# EAGLE board BRAIN_Breakout_SW (EAGLE 6.6.0)
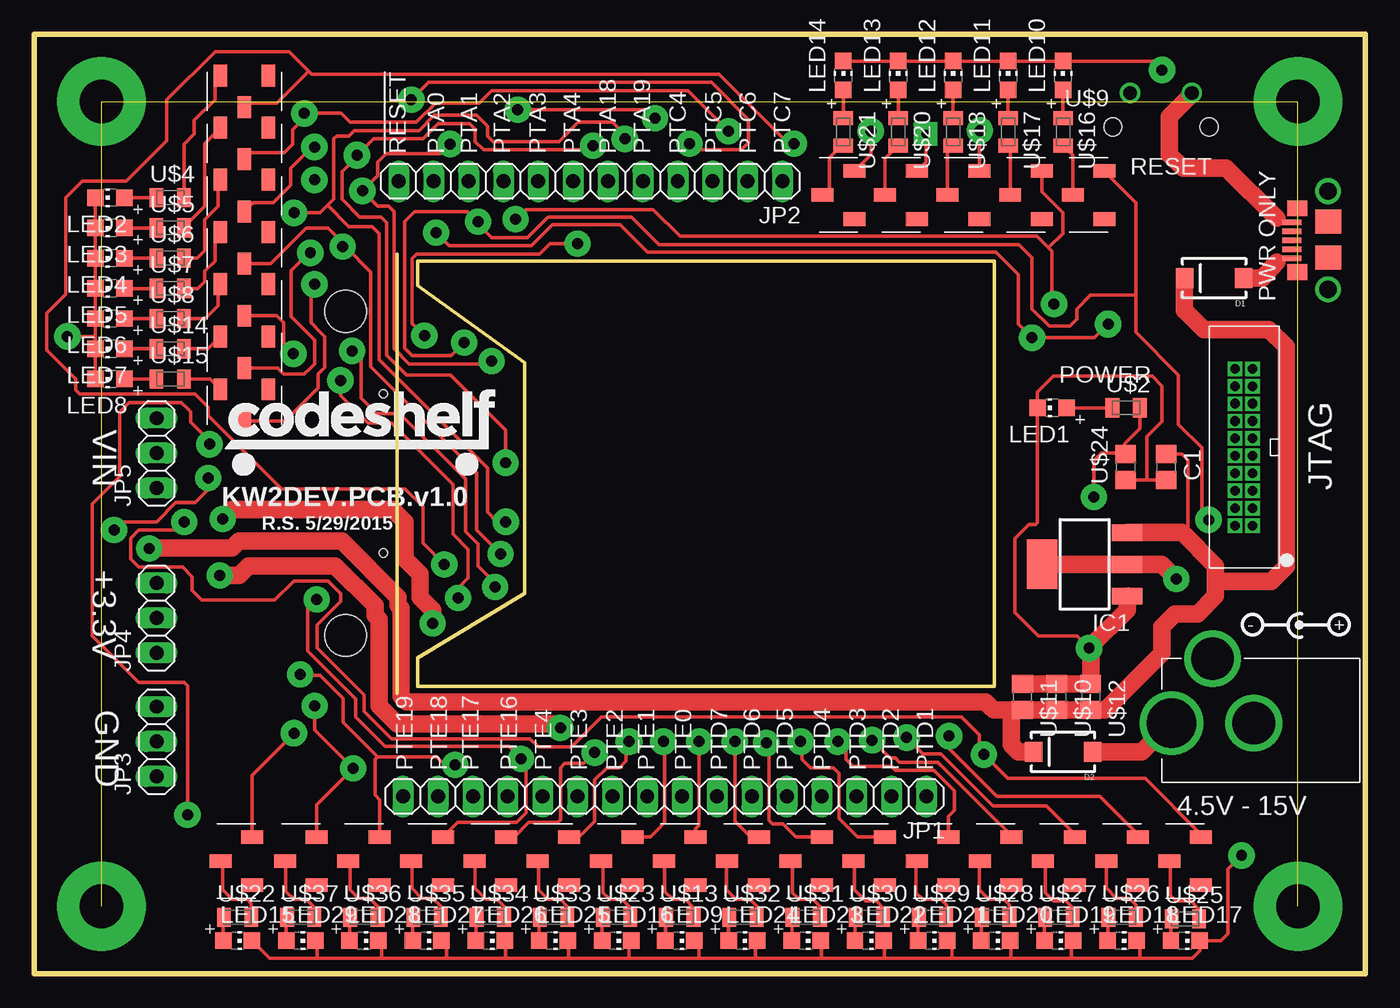
[diagram p0: board, top side]
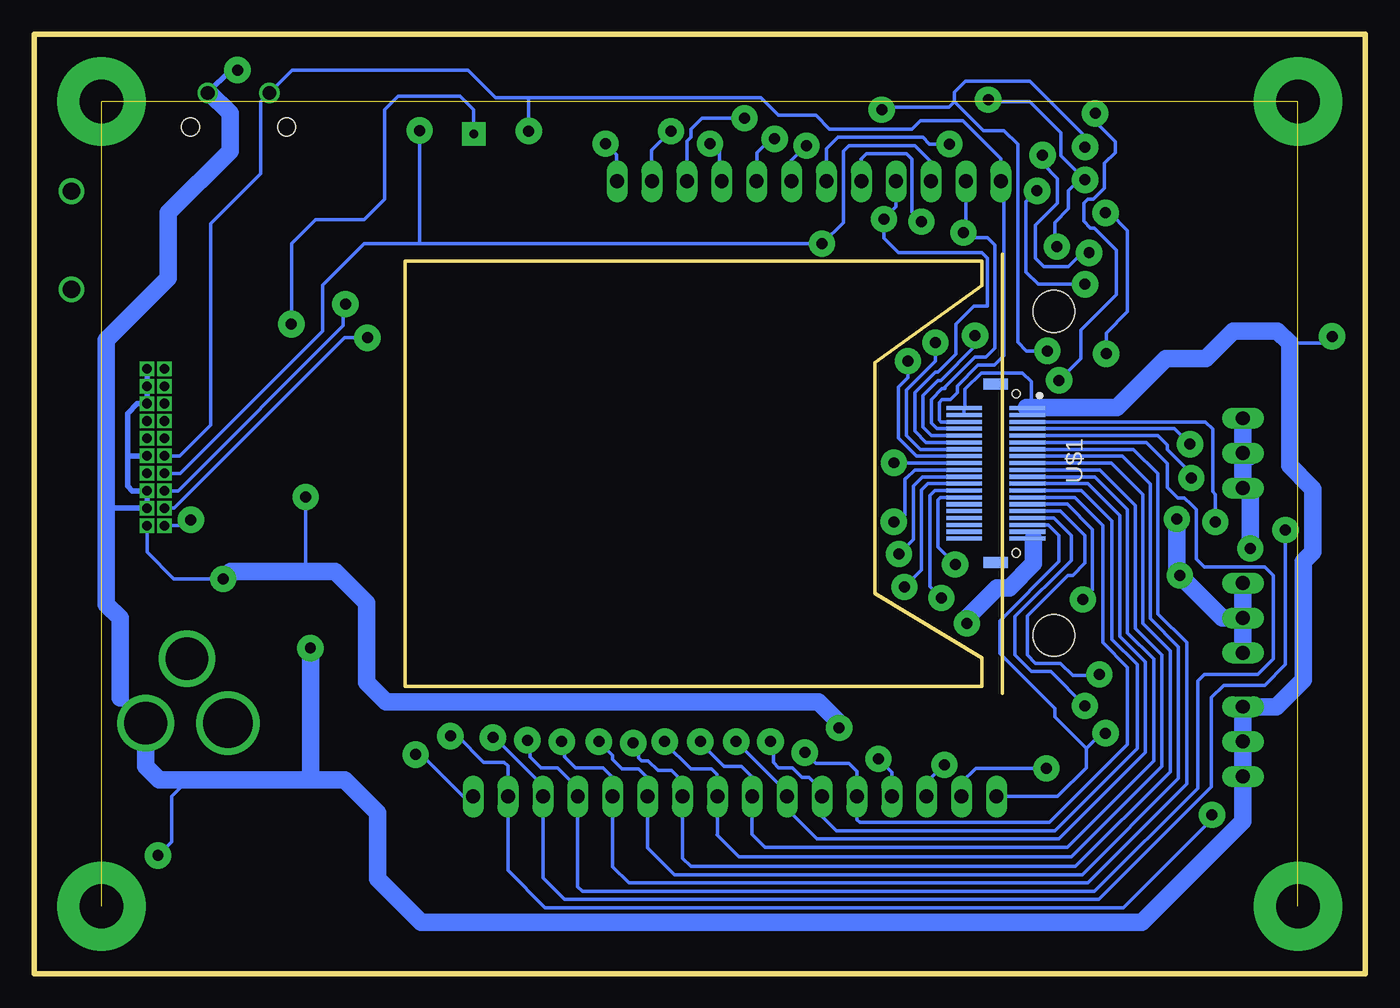
[diagram p1: board, bottom side, seen from below]

Size 96.9 x 68.4 mm. Coordinates in mm from the lower left corner, seen from the top.
Outline: 0,68.4 96.9,68.4 96.9,0 0,0 0,68.4
Copper layers (1*16): Top 0.035mm / dielectric 1.5mm / Bottom 0.035mm
Design rules "default *": minimum track width 10mil, minimum drill 0.8mm, track to track 0.15mm, track to pad 0.15mm, pad to pad 0.15mm, via to via 0.15mm, smd to smd 0.15mm, copper to edge 0.1mm, drill to drill 0.1mm, minimum pad ring 0.1mm, minimum via ring 0.55mm, stop-mask expansion 4mil, vias tented up to drill 0.8mm, thermal gap 10mil

## Footprints (pad centres in the part's own frame; a part is rotated, then mirrored left to right if it is on the bottom)
C0805 = smd 1.3 x 1.5: 1 -0.95,0; 2 0.95,0
SMA-DIODE = smd 1.27 x 1.47: A -2.15,0; C 2.15,0
SOT223 = smd 1.219 x 2.235: 1 -2.311,-3.099; 2 0,-3.099; 3 2.311,-3.099 | smd 3.6 x 2.2: 4 0,3.099
1X16 = drill 1.016 long: 1 -19.05,0; 2 -16.51,0; 3 -13.97,0; 4 -11.43,0; 5 -8.89,0; 6 -6.35,0; 7 -3.81,0; 8 -1.27,0; 9 1.27,0; 10 3.81,0; 11 6.35,0; 12 8.89,0; 13 11.43,0; 14 13.97,0; 15 16.51,0; 16 19.05,0
1X12 = drill 1.016 long: 1 -13.97,0; 2 -11.43,0; 3 -8.89,0; 4 -6.35,0; 5 -3.81,0; 6 -1.27,0; 7 1.27,0; 8 3.81,0; 9 6.35,0; 10 8.89,0; 11 11.43,0; 12 13.97,0
1X03 = drill 1.016 long: 1 -2.54,0; 2 0,0; 3 2.54,0
CHIP-LED0805 = smd 1.2 x 1.2: A 0,-1.05; C 0,1.05
DF12_F = smd 0.3 x 2.6: P$1 -4.75,2.3; P$2 -4.75,-2.3; P$3 -4.25,2.3; P$4 -4.25,-2.3; P$5 -3.75,2.3; P$6 -3.75,-2.3; P$7 -3.25,2.3; P$8 -3.25,-2.3; P$9 -2.75,2.3; P$10 -2.75,-2.3; P$11 -2.25,2.3; P$12 -2.25,-2.3; P$13 -1.75,2.3; P$14 -1.75,-2.3; P$15 -1.25,2.3; P$16 -1.25,-2.3; P$17 -0.75,2.3; P$18 -0.75,-2.3; P$19 -0.25,2.3; P$20 -0.25,-2.3; P$21 0.25,2.3; P$22 0.25,-2.3; P$23 0.75,2.3; P$24 0.75,-2.3; P$25 1.25,2.3; P$26 1.25,-2.3; P$27 1.75,2.3; P$28 1.75,-2.3; P$29 2.25,2.3; P$30 2.25,-2.3; P$31 2.75,2.3; P$32 2.75,-2.3; P$33 3.25,2.3; P$34 3.25,-2.3; P$35 3.75,2.3; P$36 3.75,-2.3; P$37 4.25,2.3; P$38 4.25,-2.3; P$39 4.75,2.3; P$40 4.75,-2.3 | smd 0.8 x 1.8: P$41 -6.5,0; P$42 6.5,0 | hole 0.6: -5.8,1.5; 5.8,1.5 | hole 3.048: -11.8,4.24; 11.8,4.24
RF-C0805 = smd 1 x 1.4: 1 -1,0; 2 1,0
BARREL_CUI_PJ-002A = drill 3.6: P$1 0,0 | drill 3.1: P$2 6,0; P$3 3,4.7
RA_BUTTON = drill 0.99: P$1 -2.25,0; P$2 2.25,0 | hole 1.3: -3.501,2.49; 3.501,2.49
2X10JTAG = drill 0.7 pad 1 square: P$1 -6.35,-1.27; P$2 -6.35,0; P$3 -5.08,-1.27; P$4 -5.08,0; P$5 -3.81,-1.27; P$6 -3.81,0; P$7 -2.54,-1.27; P$8 -2.54,0; P$9 -1.27,-1.27; P$10 -1.27,0; P$11 0,-1.27; P$12 0,0; P$13 1.27,-1.27; P$14 1.27,0; P$15 2.54,-1.27; P$16 2.54,0; P$17 3.81,-1.27; P$18 3.81,0; P$19 5.08,-1.27; P$20 5.08,0
CJS = smd 1 x 1.6: P$1 0,1.15; P$2 -1.75,-1.15; P$3 1.75,-1.15
USB3076-30-A = smd 0.4 x 1.4: D+ 0,0; D- -0.65,0; GND 1.3,0; P$4 0.65,0; VCC -1.3,0 | smd 1.15 x 1.45: P$6 -2.32,-0.42; P$7 2.32,-0.42 | drill 1.25: P$8 -3.575,-2.65; P$9 3.575,-2.65 | smd 1.75 x 1.9: P$10 -1.25,-2.65; P$11 1.35,-2.65

## Placement (x,y rotation side)
C1  [C0805]  82.4,36.9 270 top
D1  [SMA-DIODE]  85.9,50.65 180 top
D2  [SMA-DIODE]  74.9,16.15 180 top
IC1  [SOT223]  76.47,29.8 90 top
JP1  [1X16]  45.9,12.9 180 top
JP2  [1X12]  40.5,57.7 180 top
JP3  [1X03]  8.9,16.9 90 top
JP4  [1X03]  8.9,25.9 90 top
JP5  [1X03]  8.9,37.9 90 top
LED1  [CHIP-LED0805]  74.1,41.2 90 top
LED2  [CHIP-LED0805]  5.5,56.5 90 top
LED3  [CHIP-LED0805]  5.5,54.3 90 top
LED4  [CHIP-LED0805]  5.5,52.1 90 top
LED5  [CHIP-LED0805]  5.5,49.9 90 top
LED6  [CHIP-LED0805]  5.5,47.7 90 top
LED7  [CHIP-LED0805]  5.5,45.5 90 top
LED8  [CHIP-LED0805]  5.5,43.3 90 top
LED9  [CHIP-LED0805]  47,2.4 270 top
LED10  [CHIP-LED0805]  74.9,65.4 0 top
LED11  [CHIP-LED0805]  70.9,65.4 0 top
LED12  [CHIP-LED0805]  66.9,65.4 0 top
LED13  [CHIP-LED0805]  62.9,65.4 0 top
LED14  [CHIP-LED0805]  58.9,65.4 0 top
LED15  [CHIP-LED0805]  14.8,2.4 270 top
LED16  [CHIP-LED0805]  42.4,2.4 270 top
LED17  [CHIP-LED0805]  83.8,2.4 270 top
LED18  [CHIP-LED0805]  79.2,2.4 270 top
LED19  [CHIP-LED0805]  74.6,2.4 270 top
LED20  [CHIP-LED0805]  70,2.4 270 top
LED21  [CHIP-LED0805]  65.4,2.4 270 top
LED22  [CHIP-LED0805]  60.8,2.4 270 top
LED23  [CHIP-LED0805]  56.2,2.4 270 top
LED24  [CHIP-LED0805]  51.6,2.4 270 top
LED25  [CHIP-LED0805]  37.8,2.4 270 top
LED26  [CHIP-LED0805]  33.2,2.4 270 top
LED27  [CHIP-LED0805]  28.6,2.4 270 top
LED28  [CHIP-LED0805]  24,2.4 270 top
LED29  [CHIP-LED0805]  19.4,2.4 270 top
U$1  DF12_F  [DF12_F]  26.9,36.43 270 bottom
U$2  [RF-C0805]  79.5,41.2 0 top
U$3  BARREL_CUI_PJ-002A  [BARREL_CUI_PJ-002A]  82.79,18.23 0 top
U$4  [RF-C0805]  9.9,56.5 0 top
U$5  [RF-C0805]  9.9,54.3 0 top
U$6  [RF-C0805]  9.9,52.1 0 top
U$7  [RF-C0805]  9.9,49.9 0 top
U$8  [RF-C0805]  9.9,47.7 0 top
U$9  RA_BUTTON  [RA_BUTTON]  82.03,64.14 180 top
U$10  [C0805]  74.43,20.15 270 top
U$11  [C0805]  71.94,20.15 270 top
U$12  [C0805]  76.92,20.15 270 top
U$13  [RF-C0805]  47,4.1 0 top
U$14  [RF-C0805]  9.9,45.5 0 top
U$15  [RF-C0805]  9.9,43.3 0 top
U$16  [RF-C0805]  74.9,61.3 270 top
U$17  [RF-C0805]  70.9,61.3 270 top
U$18  [RF-C0805]  66.9,61.3 270 top
U$19  2X10JTAG  [2X10JTAG]  87.43,38.97 90 top
U$20  [RF-C0805]  62.9,61.3 270 top
U$21  [RF-C0805]  58.9,61.3 270 top
U$22  [RF-C0805]  14.8,4.1 0 top
U$23  [RF-C0805]  42.4,4.1 0 top
U$24  [C0805]  79.46,36.9 90 top
U$25  [RF-C0805]  83.8,4 0 top
U$26  [RF-C0805]  79.2,4.1 0 top
U$27  [RF-C0805]  74.6,4.1 0 top
U$28  [RF-C0805]  70,4.1 0 top
U$29  [RF-C0805]  65.4,4.1 0 top
U$30  [RF-C0805]  60.8,4.1 0 top
U$31  [RF-C0805]  56.2,4.1 0 top
U$32  [RF-C0805]  51.6,4.1 0 top
U$33  [RF-C0805]  37.8,4.1 0 top
U$34  [RF-C0805]  33.2,4.1 0 top
U$35  [RF-C0805]  28.6,4.1 0 top
U$36  [RF-C0805]  24,4.1 0 top
U$37  [RF-C0805]  19.4,4.1 0 top
U$38  CJS  [CJS]  83.8,8.2 90 top
U$39  CJS  [CJS]  79.2,8.2 90 top
U$40  CJS  [CJS]  74.6,8.2 90 top
U$41  CJS  [CJS]  70,8.2 90 top
U$42  CJS  [CJS]  65.4,8.2 90 top
U$43  CJS  [CJS]  56.2,8.2 90 top
U$44  CJS  [CJS]  47,8.2 90 top
U$45  CJS  [CJS]  14.7,8.2 90 top
U$46  CJS  [CJS]  19.4,8.2 90 top
U$47  CJS  [CJS]  24,8.2 90 top
U$48  CJS  [CJS]  28.6,8.2 90 top
U$49  CJS  [CJS]  33.2,8.2 90 top
U$50  CJS  [CJS]  37.8,8.2 90 top
U$51  CJS  [CJS]  42.4,8.2 90 top
U$52  CJS  [CJS]  51.6,8.2 90 top
U$53  CJS  [CJS]  60.8,8.2 90 top
U$54  CJS  [CJS]  76.75,56.7 90 top
U$55  CJS  [CJS]  72.2,56.7 90 top
U$56  CJS  [CJS]  67.65,56.7 90 top
U$57  CJS  [CJS]  63.1,56.7 90 top
U$58  CJS  [CJS]  58.55,56.7 90 top
U$59  CJS  [CJS]  15.3,64.25 180 top
U$60  CJS  [CJS]  15.3,60.45 180 top
U$61  CJS  [CJS]  15.3,56.65 180 top
U$62  CJS  [CJS]  15.3,52.85 180 top
U$63  CJS  [CJS]  15.3,49.05 180 top
U$64  CJS  [CJS]  15.3,45.25 180 top
U$65  CJS  [CJS]  15.3,41.4 180 top
X1  USB  [USB3076-30-A]  91.55,53.4 90 top

## Library data of the parts
C1 U$12 U$24 = GW-devices; MFGN: Murata; MFGP: GRM219R61E106KA12D
D1 D2 = SparkFun; MFGN: Diodes Inc; MFGP: SBRT3U45SA-13
IC1 = KW2; MFGN: OnSemi; MFGP: NCP1117ST33T3G
JP1 = pinhead; MFGN: Sullins Connector; MFGP: PRPC016SAAN-RC
JP2 = pinhead; MFGN: Sullins Connector; MFGP: PRPC012SAAN-RC
JP3-JP5 = pinhead; MFGN: Sullins Connector; MFGP: PRPC003SAAN-RC
LED1 = adafruit; MFGN: Wurth Electronics Inc; MFGP: 150080BS75000
LED2-LED29 = adafruit; MFGN: Kingbright; MFGP: APT2012SECK
U$1 = KW2; MFGN: Hirose; MFGP: DF12(3.0)-40DP-0.5V(86)
U$2 = GW-devices; MFGN: Panasonic; MFGP: ERJ-6ENF2000V
U$3 = KW2; MFGN: CUI; MFGP: PJ002-A
U$4-U$8 U$13-U$18 U$20-U$23 U$25-U$37 = GW-devices; MFGN: Panasonic; MFGP: ERJ-6ENF2001V
U$9 = KW2; MFGN: TE; MFGP: 1825027-5
U$10 = GW-devices; MFGN: TDK; MFGP: C2012X5R1H104K085AA
U$11 = GW-devices; MFGN: TDK; MFGP: C2012X5R1E105K125AA
U$19 = KW2; MFGN: CNC Tech; MFGP: 3220-20-0100-00
U$38-U$65 = KW2; MFGN: Copal Electronics Inc; MFGP: CJS-1200TA
X1 = SparkFun; MFGN: GLOBAL CONNECTOR TECHNOLOGY; MFGP: USB3076-30-A

## Nets
+3V3: IC1.2 IC1.4 JP4.1 JP4.2 JP4.3 U$1.P$37 U$1.P$39 U$2.2 U$19.P$1 U$24.2
GND: C1.2 IC1.1 JP3.1 JP3.2 JP3.3 LED1.C LED2.C LED3.C LED4.C LED5.C LED6.C LED7.C LED8.C LED9.C LED10.C LED11.C LED12.C LED13.C LED14.C LED15.C LED16.C LED17.C LED18.C LED19.C LED20.C LED21.C LED22.C LED23.C LED24.C LED25.C LED26.C LED27.C LED28.C LED29.C U$1.P$1 U$1.P$2 U$1.P$3 U$1.P$4 U$3.P$2 U$9.P$1 U$10.1 U$11.1 U$12.1 U$19.P$3 U$19.P$5 U$19.P$9 U$19.P$15 U$19.P$17 U$19.P$19 U$24.1 X1.GND
N$1: LED1.A U$2.1
N$2: LED2.A U$4.1
N$3: LED3.A U$5.1
N$4: LED4.A U$6.1
N$5: LED8.A U$15.1
N$6: LED5.A U$7.1
N$7: LED6.A U$8.1
N$8: LED7.A U$14.1
N$9: LED9.A U$13.1
N$10: U$13.2 U$44.P$1
N$11: U$15.2 U$65.P$3
N$12: U$14.2 U$64.P$3
N$13: U$8.2 U$63.P$3
N$14: U$7.2 U$62.P$3
N$15: U$6.2 U$61.P$3
N$16: U$5.2 U$60.P$3
N$17: U$4.2 U$59.P$3
N$18: U$25.2 U$38.P$1
N$19: U$26.2 U$39.P$1
N$20: U$27.2 U$40.P$1
N$21: JP2.1 U$1.P$28 U$59.P$1
N$22: JP2.2 U$1.P$26 U$60.P$1
N$23: JP2.3 U$1.P$24 U$61.P$1
N$24: JP2.4 U$1.P$22 U$62.P$1
N$25: JP2.5 U$1.P$20 U$63.P$1
N$26: JP2.6 U$1.P$18 U$64.P$1
N$27: JP2.7 U$1.P$16 U$65.P$1
N$28: LED15.A U$22.1
N$29: LED17.A U$25.1
N$30: LED18.A U$26.1
N$31: LED19.A U$27.1
N$32: LED20.A U$28.1
N$33: LED16.A U$23.1
N$34: LED25.A U$33.1
N$35: LED26.A U$34.1
N$36: LED27.A U$35.1
N$37: LED21.A U$29.1
N$38: LED22.A U$30.1
N$39: LED23.A U$31.1
N$40: LED24.A U$32.1
N$41: U$28.2 U$41.P$1
N$42: U$29.2 U$42.P$1
N$43: U$31.2 U$43.P$1
N$44: U$37.2 U$46.P$1
N$45: U$36.2 U$47.P$1
N$46: LED28.A U$36.1
N$48: JP2.8 U$1.P$14 U$19.P$2 U$54.P$3
N$49: LED10.A U$16.1
N$50: U$16.2 U$54.P$1
N$51: JP2.9 U$1.P$12 U$19.P$6 U$55.P$3
N$52: LED11.A U$17.1
N$53: U$17.2 U$55.P$1
N$54: JP2.10 U$1.P$10 U$19.P$8 U$56.P$3
N$55: LED12.A U$18.1
N$56: U$18.2 U$56.P$1
N$57: JP2.11 U$1.P$8 U$19.P$4 U$57.P$3
N$58: LED13.A U$20.1
N$59: U$20.2 U$57.P$1
N$60: JP2.12 U$1.P$6 U$9.P$2 U$19.P$10 U$58.P$3
N$61: LED14.A U$21.1
N$62: U$21.2 U$58.P$1
N$63: LED29.A U$37.1
N$64: U$22.2 U$45.P$1
N$65: U$35.2 U$48.P$1
N$66: U$34.2 U$49.P$1
N$67: U$33.2 U$50.P$1
N$68: U$23.2 U$51.P$1
N$69: U$32.2 U$52.P$1
N$70: U$30.2 U$53.P$1
N$71: D2.A U$3.P$1
N$72: D1.A X1.VCC
PTD1: JP1.1 U$1.P$5 U$38.P$3
PTD2: JP1.2 U$1.P$7 U$39.P$3
PTD3: JP1.3 U$1.P$9 U$40.P$3
PTD4: JP1.4 U$1.P$11 U$41.P$3
PTD5: JP1.5 U$1.P$13 U$42.P$3
PTD6: JP1.6 U$1.P$15 U$53.P$3
PTD7: JP1.7 U$1.P$17 U$43.P$3
PTE0: JP1.8 U$1.P$19 U$52.P$3
PTE1: JP1.9 U$1.P$21 U$44.P$3
PTE2: JP1.10 U$1.P$23 U$51.P$3
PTE3: JP1.11 U$1.P$25 U$50.P$3
PTE4: JP1.12 U$1.P$27 U$49.P$3
PTE16: JP1.13 U$1.P$29 U$48.P$3
PTE17: JP1.14 U$1.P$31 U$47.P$3
PTE18: JP1.15 U$1.P$33 U$46.P$3
PTE19: JP1.16 U$1.P$35 U$45.P$3
V+: C1.1 D1.C D2.C IC1.3 JP5.1 JP5.2 JP5.3 U$10.2 U$11.2 U$12.2

## Tracks (layer width: path | path; a pad name or v marks a point on that pad's centre or on a via)
+3V3  (via drill 0.8)
  Top 0.254: U$2.2 80.5,39.7 79.4,38.6 79.4,37.91 U$24.2 79.41,37.9 77.7,37.9 77.15,37.35 v77.15,34.7
  Top 1.27: v13.5,29 14.9,29 15.6,29.7 21.9,29.7 24.8,26.8 24.8,26.1 25.1,25.8 25.1,19.5 26.4,18.2 38,18.2 v38.3,17.9 | v83.15,28.75 82.1,29.8 IC1.2 IC1.4 | v13.7,33.1 14.4,33.8 26.1,33.8 27,32.9 27,30.2 28.1,29.1 28.1,27.4 29,26.5 v29,25.5
  Bottom 0.254: U$1.P$37 U$1.P$39 24.58,31.7 24.15,31.7 | 82.97,28.88 83.03,28.88 v83.15,28.75 86.75,28.75 88.7,30.7 U$19.P$1 | v77.15,34.7 77.15,29.35 77.2,29.3
  Bottom 1.27: 83.05,28.8 82.97,28.88 | 24.15,31.7 24.15,29.85 25.9,28.1 26.8,28.1 29,25.9 v29,25.5 | JP4.3 JP4.2 | JP4.2 JP4.1 | v83.15,28.75 82.6,29.3 77.2,29.3 75,29.3 72.7,27 72.7,21.2 71.3,19.8 39.8,19.8 38.3,18.3 v38.3,17.9 | JP4.2 10.4,25.9 v13.5,29 13.7,29.2 v13.7,33.1
GND  (via drill 0.8, 0.8 pad 1.93)
  Top 0.254: U$24.1 81,35.95 | 81,35.95 C1.2 | 76.92,23.58 v76.8,23.7 75.9,24.6 73.1,24.6 71.4,26.3 71.4,31.7 72.4,32.7 72.9,32.7 73.05,32.85 LED1.C 73.05,42.35 74.2,43.5 81.4,43.5 82.1,42.8 82.1,40.2 81,39.1 81,35.95 | LED14.C LED13.C LED12.C LED11.C LED10.C 77.95,66.45 81.45,66.45 v82.1,65.8 | v2.4,46.4 4.45,46.4 | LED2.C LED3.C LED4.C LED5.C LED6.C 4.45,46.4 | 4.45,46.4 LED7.C LED8.C | LED15.C 17.15,1.1 20.6,1.1 | 20.6,1.1 25.3,1.1 | 25.3,1.1 30,1.1 | 30,1.1 34.3,1.1 | 34.3,1.1 38.9,1.1 | 38.9,1.1 43.3,1.1 | 43.3,1.1 48.4,1.1 | 48.4,1.1 52.5,1.1 | 52.5,1.1 57.3,1.1 | 57.3,1.1 61.9,1.1 | 61.9,1.1 66.8,1.1 | 66.8,1.1 71.1,1.1 | 71.1,1.1 75.5,1.1 | 75.5,1.1 80.5,1.1 | 80.5,1.1 84.3,1.1 84.85,1.65 LED17.C 86.4,2.4 86.9,2.9 86.9,7.6 v87.9,8.6 | LED18.C 80.5,2.15 80.5,1.1 | LED19.C 75.5,2.25 75.5,1.1 | LED20.C 71.1,2.35 71.1,1.1 | LED21.C 66.8,2.05 66.8,1.1 | LED22.C 61.9,2.35 61.9,1.1 | LED23.C 57.3,2.35 57.3,1.1 | LED24.C 52.5,2.25 52.5,1.1 | LED9.C 48.4,2.05 48.4,1.1 | LED16.C 43.3,2.25 43.3,1.1 | LED25.C 38.9,2.35 38.9,1.1 | LED26.C 34.3,2.35 34.3,1.1 | LED29.C 20.6,2.25 20.6,1.1 | LED28.C 25.3,2.15 25.3,1.1 | LED27.C 30,2.05 30,1.1 | X1.GND 90.85,54.7 90.45,55
  Top 1.27: IC1.1 79.57,26.47 v76.8,23.7 | U$11.1 U$10.1 U$12.1 76.92,23.58 | U$9.P$1 84.28,64.03 82.65,62.4 82.65,59.65 83.65,58.65 86.8,58.65 90.45,55
  Bottom 0.254: U$1.P$4 U$1.P$2 29.15,41.23 29.15,42.55 27.95,43.75 24.95,43.75 24.3,43.1 24.3,41.48 U$1.P$1 | U$1.P$3 U$1.P$1 | U$1.P$1 24.65,41.23 | 5.5,45.9 2.9,45.9 v2.4,46.4 | 85.2,13.9 85.4,14.1 | U$19.P$15 | 85.7,14.1 86.9,12.9 86.9,9.6 v87.9,8.6 | U$9.P$1 84.2,64.22
  Bottom 0.406: 90.65,20.09 U$3.P$2 | U$19.P$9 90,37.7 90.1,37.6 | 90.1,37.6 90.1,35.5 89.76,35.16 U$19.P$5 U$19.P$3 89.86,33.89 91.65,33.89 91.65,33.9 | 90.1,37.6 90.1,40.8 89.4,41.5 U$19.P$15 | U$19.P$19 U$19.P$17 U$19.P$15 | v82.1,65.8 82.62,65.8 U$9.P$1
  Bottom 1.016: 3.8,35.3 3.95,35.45
  Bottom 1.27: 24.65,41.23 18.07,41.23 14.5,44.8 11.6,44.8 9.6,46.8 6.4,46.8 5.5,45.9 5.5,37 3.95,35.45 | U$3.P$2 88.79,15.09 87.8,14.1 85.7,14.1 85.4,14.1 76.7,14.1 | 76.7,14.1 74.31,14.1 71.9,11.69 71.9,6.9 68.75,3.75 16.25,3.75 8.9,11.1 JP3.1 JP3.2 JP3.3 6.46,19.44 4.5,21.4 4.5,30 3.8,30.7 3.8,35.3 | v76.8,23.7 76.8,14.2 76.7,14.1 | 90.65,20.09 90.65,25.9 91.65,26.9 91.65,33.9 91.65,46.15 90.78,47.02 | 90.78,47.02 90.65,47.15 | 84.2,64.22 84.2,64.2 82.65,62.65 82.65,59.9 87.15,55.4 87.15,50.65 90.78,47.02
N$1
  Top 0.254: LED1.A U$2.1
N$2
  Top 0.254: LED2.A U$4.1
N$3
  Top 0.254: LED3.A U$5.1
N$4
  Top 0.254: LED4.A U$6.1
N$5
  Top 0.254: LED8.A U$15.1
N$6
  Top 0.254: LED5.A U$7.1
N$7
  Top 0.254: LED6.A U$8.1
N$8
  Top 0.254: LED7.A U$14.1
N$9
  Top 0.254: U$13.1 45.95,4.05 LED9.A
N$10
  Top 0.254: U$13.2 48,4.8 47.4,5.4 46.5,5.4 45.9,6 45.9,7.85 45.85,7.9 U$44.P$1
N$11
  Top 0.254: U$15.2 12.8,43.3 U$65.P$3
N$12
  Top 0.254: U$14.2 12.65,45.5 U$64.P$3
N$13
  Top 0.254: U$8.2 12.45,47.7 13.4,48.65 13.4,50.05 U$63.P$3
N$14
  Top 0.254: U$7.2 11.9,49.9 12.4,50.4 12.4,51.15 13.15,51.9 13.15,53.6 U$62.P$3
N$15
  Top 0.254: U$6.2 11.85,52.1 12.4,52.65 12.4,54.9 12.9,55.4 13.4,55.9 13.4,57.65 U$61.P$3
N$16
  Top 0.254: U$5.2 10.9,54.4 12.4,55.9 12.4,60.45 U$60.P$3
N$17
  Top 0.254: U$4.2 10.9,60.4 11.65,61.15 11.65,62.15 13.15,63.65 13.15,65 U$59.P$3
N$18
  Top 0.254: U$25.2 84.8,4.7 84.2,5.3 83.1,5.3 82.7,5.7 82.7,7.85 82.65,7.9 U$38.P$1
N$19
  Top 0.254: U$39.P$1 78.05,6.25 78.8,5.5 79.7,5.5 80.2,5 U$26.2
N$20
  Top 0.254: U$27.2 75.6,4.8 75.1,5.3 74.2,5.3 73.6,5.9 73.6,8 73.45,8.15 U$40.P$1
N$21  (via drill 0.8)
  Top 0.254: v29.85,29.8 28.3,31.35 28.3,34 27,35.3 20.1,35.3 18.5,35.3 18,35.3 12.9,40.4 12.65,40.65 12.65,41.25 11.7,42.2 3.3,42.2 3,42.5 3,43.3 0.9,45.4 0.9,48.1 2.3,49.5 2.3,56.5 3.5,57.7 6.7,57.7 9.65,60.65 9.65,63.65 13.15,67.15 18.55,67.15 19.98,65.73 | v55.3,60.45 54.9,60.85 54.5,60.85 49.85,65.5 20.2,65.5 19.98,65.73 | U$59.P$1 15.6,63.4 17.65,63.4 19.98,65.73
  Bottom 0.254: U$1.P$28 30.92,34.68 31.1,34.5 31.1,31.05 v29.85,29.8 | JP2.1 54.5,57.73 54.5,59.65 v55.3,60.45
N$22  (via drill 0.8, 0.8 pad 1.93)
  Top 0.254: v30.85,27.35 30.85,28.05 31.6,28.8 31.6,30.9 30.5,32 30.5,35.6 26,40.1 24.3,40.1 22.3,42.1 v22.3,43.2 | v50.55,61.35 47.6,64.3 33.3,64.3 32.4,63.4 29.2,63.4 27.8,62 23,62 22.35,62.65 v19.65,62.65 19.65,62.3 18.81,61.46 18.81,60.41 18.2,59.8 15.8,59.8 U$60.P$1
  Bottom 0.254: U$1.P$26 31.32,35.18 31.7,34.8 31.7,28.2 v30.85,27.35 | JP2.2 51.95,57.72 51.95,59.95 v50.55,61.35 | v22.3,43.2 20.7,44.8 20.7,46.85 18.1,49.45 18.1,52.7 19.7,54.3 20,54.3 20.5,54.8 20.5,56.1 20.2,56.4 19.8,56.4 19,57.2 19,59 18.2,59.8 18.2,60.6 19.65,62.05 v19.65,62.65
N$23  (via drill 0.8, 0.8 pad 1.93)
  Top 0.254: v45.2,62.3 44.6,62.9 v35.2,62.9 | v33.55,28.15 33.55,28.45 32.3,29.7 32.3,31.3 31.4,32.2 31.4,36 26.6,40.8 24.9,40.8 23.8,41.9 23.8,44.7 v23.15,45.35 | U$61.P$1 15.95,56.15 17.4,56.15 18.65,57.4 18.65,58.65 20.2,60.2 v20.4,60.2
  Bottom 0.254: v45.2,62.3 48.3,62.3 49.1,61.5 49.1,60.9 49.39,60.61 49.39,60.31 JP2.3 | U$1.P$24 31.82,35.68 32.3,35.2 32.3,29.4 v33.55,28.15 | v20.4,60.2 20.4,61 24.4,65 29.1,65 29.9,64.2 29.9,63.5 | v23.15,45.35 24.65,45.35 25.3,46 25.3,60.4 26.3,61.4 27.8,61.4 29.9,63.5 | 29.9,63.5 30.3,63.1 35,63.1 v35.2,62.9
N$24  (via drill 0.8, 0.8 pad 1.93)
  Top 0.254: v33.95,30.55 32.2,32.3 32.2,36.5 24.5,44.2 24.5,51.1 22.65,52.95 v22.45,52.95 22.45,53.25 21.4,54.3 19.8,54.3 18.4,52.9 17.2,51.7 U$62.P$1 | v47.7,60.45 48.15,60 51.5,60 52,60.5 52,62.2 49.3,64.9 28.7,64.9 v27.45,63.65
  Bottom 0.254: U$1.P$22 32.22,36.18 32.9,35.5 32.9,31.6 v33.95,30.55 | v22.45,52.95 22.6,53.1 22.6,54.7 21.6,55.7 21.6,57 20.9,57.7 20.9,57.8 v20.4,57.8 22.15,59.55 22.15,61.25 24.4,63.5 27.3,63.5 v27.45,63.65 | v47.7,60.45 47,59.75 47,59.85 47,57.85 JP2.4
N$25  (via drill 0.8 pad 1.93)
  Top 0.254: v34.31,32.9 33.7,32.9 33,33.6 33,36.8 25.1,44.7 25.1,53.9 24.6,54.4 22.9,54.4 21.35,55.95 | 21.35,55.95 21.8,56.4 21.8,60.8 22,61 22.9,61 23.3,61.4 28,61.4 29.1,62.5 32.2,62.5 33,61.7 33,61 33.4,60.6 38.2,60.6 39.6,62 42.1,62 43,61.1 v43,60.8 | v18.9,55.4 20.8,55.4 21.35,55.95 | U$63.P$1 17.6,47.9 17.65,47.9 18.15,47.4 18.15,45.85 v18.85,45.15
  Bottom 0.254: U$1.P$20 32.8,36.68 33.4,36.08 33.42,36.08 33.5,36 33.5,33.4 34,32.9 v34.31,32.9 | JP2.5 44.3,59.8 43.3,60.8 v43,60.8 | v18.9,55.4 18.6,55.4 17.3,54.1 17.3,48.2 18.85,46.65 v18.85,45.15
N$26  (via drill 0.8, 0.8 pad 1.93)
  Top 0.254: v40.69,60.29 40.4,60 32.7,60 32.1,60.6 32.1,61.5 31.7,61.9 29.4,61.9 28.3,60.8 24.7,60.8 v23.5,59.6 23.5,59.5 22.4,58.4 22.4,56.4 23.7,55.1 25.25,55.1 25.65,54.7 25.65,45.05 27.1,43.6 30.3,43.6 34.3,39.6 v34.3,37.2 | v20.1,52.5 20,52.5 18.7,51.2 18.7,48.95 18.7,48.1 18.7,47.85 20.4,46.15 20.4,44.4 20.15,44.15 19.65,43.65 18.15,43.65 17.7,44.1 U$64.P$1
  Bottom 0.254: U$1.P$18 34.28,37.18 v34.3,37.2 | v40.69,60.29 41.8,59.19 41.8,57.73 JP2.6 | v23.5,59.6 23.5,59 22.4,57.9 22.4,56.1 24,54.5 24,52.1 23.4,51.5 21.6,51.5 20.6,52.5 v20.1,52.5
N$27  (via drill 0.8, 0.8 pad 1.93)
  Top 0.254: v30.28,60.42 29.56,59.7 25.6,59.7 25,59.1 25,58.1 v23.9,57 25,55.9 25.8,55.9 26.2,55.5 26.2,45.5 27.3,44.4 33.1,44.4 v33.3,44.6 | U$65.P$1 18.25,40.25 20.65,42.65 20.65,43.65 21.15,44.15 21.15,46.4 20.9,46.65 20.15,47.4 20.15,49.95 v20.4,50.2
  Bottom 0.254: U$1.P$16 32.68,37.68 34,39 34,42.7 33.3,43.4 v33.3,44.6 | v30.28,60.42 31.72,60.42 32.2,60.9 38.4,60.9 39.23,60.07 JP2.7 | v23.9,57 24.7,56.2 24.7,51.1 23.8,50.2 v20.4,50.2
N$28
  Top 0.254: U$22.1 13.75,4.05 LED15.A
N$29
  Top 0.254: U$25.1 82.75,3.95 LED17.A
N$30
  Top 0.254: U$26.1 78.15,4.05 LED18.A
N$31
  Top 0.254: U$27.1 73.55,4.05 LED19.A
N$32
  Top 0.254: U$28.1 68.95,4.05 LED20.A
N$33
  Top 0.254: U$23.1 41.35,4.05 LED16.A
N$34
  Top 0.254: U$33.1 36.75,4.05 LED25.A
N$35
  Top 0.254: U$34.1 32.15,4.05 LED26.A
N$36
  Top 0.254: U$35.1 27.55,4.05 LED27.A
N$37
  Top 0.254: U$29.1 64.35,4.05 LED21.A
N$38
  Top 0.254: U$30.1 59.75,4.05 LED22.A
N$39
  Top 0.254: U$31.1 55.15,4.05 LED23.A
N$40
  Top 0.254: U$32.1 50.55,4.05 LED24.A
N$41
  Top 0.254: U$28.2 71,5 70.6,5.4 69.5,5.4 68.8,6.1 68.8,7.85 68.85,7.9 U$41.P$1
N$42
  Top 0.254: U$29.2 66.4,5 66,5.4 64.7,5.4 64.2,5.9 64.2,7.85 64.25,7.9 U$42.P$1
N$43
  Top 0.254: U$31.2 57.2,4.9 56.7,5.4 55.7,5.4 55.2,5.9 55.2,8 55.05,8.15 U$43.P$1
N$44
  Top 0.254: U$37.2 20.4,4.8 19.8,5.4 18.9,5.4 18.3,6 18.3,7.85 18.25,7.9 U$46.P$1
N$45
  Top 0.254: U$36.2 25,4.9 24.4,5.5 23.6,5.5 23,6.1 23,8 22.85,8.15 U$47.P$1
N$46
  Top 0.254: U$36.1 22.95,4.05 LED28.A
N$47  (via drill 3.17 pad 6.45)  (3 unrouted)
  other vias: 4.9,63.5 4.9,4.9 92,4.9 92,63.5
N$48  (via drill 0.8)
  Top 0.254: v31.3,45.95 30.35,45 27.5,45 26.95,45.55 26.95,54.75 27.7,55.5 31.55,55.5 v32.3,54.75 32.3,54.6 33.3,53.6 35.9,53.6 37.4,55.1 43.5,55.1 45.5,53.1 69.8,53.1 71.7,53.1 72.65,52.15 72.65,48.4 73.9,47.15 75.4,47.15 75.9,47.65 75.9,48.4 76.9,49.4 80.2,49.4 | v85.5,33.05 85,33.55 85,38.3 83.3,40 83.3,43.6 80.2,46.7 80.2,49.4 | 80.2,49.4 80.2,56.15 U$54.P$3
  Bottom 0.254: U$1.P$14 32.38,38.18 33.4,39.2 33.4,42.5 31.3,44.6 v31.3,45.95 | v32.3,54.75 33,55.45 33,59.3 33.4,59.7 36.3,59.7 36.7,59.3 36.69,59.29 JP2.8 | U$19.P$2 85.93,32.62 v85.5,33.05
N$49
  Top 0.254: LED10.A U$16.1
N$50
  Top 0.254: U$54.P$1 75.6,59.6 U$16.2
N$51  (via drill 0.8)
  Top 0.254: v35.05,54.95 35.75,55.65 45.05,55.65 47,53.7 70.9,53.7 73,53.7 73.85,52.85 | 73.85,52.85 74.1,52.6 74.1,51.9 74.1,48.9 v74.25,48.75 | U$55.P$3 73.35,56.95 74.9,55.4 74.9,53.9 73.85,52.85
  Bottom 0.254: U$1.P$12 31.98,38.68 32.8,39.5 32.8,42.3 31.3,43.8 31.1,43.8 29.8,45.1 29.8,47.3 28.5,48.6 27.5,48.6 27.5,52.1 27.9,52.5 34,52.5 35.05,53.55 v35.05,54.95 34.15,55.85 JP2.9 | U$19.P$6 86.44,35.16 74.4,47.2 74.4,48.6 v74.25,48.75
N$52
  Top 0.254: LED11.A U$17.1
N$53
  Top 0.254: U$55.P$1 71.05,60.15 U$17.2
N$54  (via drill 0.8)
  Top 0.254: v39.55,53.15 37.55,53.15 36.8,52.4 27.85,52.4 27.5,52.05 27.5,47.35 v28.4,46.45 | U$56.P$3 68.8,61.35 v68.85,61.4
  Bottom 0.254: U$1.P$10 31.58,39.18 32.2,39.8 32.2,42.1 31.1,43.2 30.9,43.2 28.4,45.7 v28.4,46.45 | 68.9,53.15 68.8,53.15 v39.55,53.15 38,54.7 38,59.9 37.6,60.3 32.8,60.3 31.61,59.11 JP2.10 | 68.9,53.15 71.85,53.15 72.9,53.15 75.9,50.15 75.9,46.8 86.27,36.43 U$19.P$8 | v68.85,61.4 68.85,53.2 68.9,53.15
N$55
  Top 0.254: LED12.A U$18.1
N$56
  Top 0.254: U$56.P$1 66.5,59.9 U$18.2
N$57  (via drill 0.6, 0.8, 0.8 pad 1.93)
  Top 0.254: v29.25,53.95 30.2,53 36.2,53 37.75,54.55 42.65,54.55 44.65,52.55 70,52.55 71.65,50.9 71.65,47.3 v72.65,46.3 77.2,46.3 v78.2,47.3 | U$57.P$3 64.9,59.1 v64.9,61.15
  Bottom 0.254: U$1.P$8 31.18,39.68 31.6,40.1 31.6,41.8 30.8,42.6 30.6,42.6 30.6,42.7 28.4,44.9 27.6,44.9 26.95,45.55 26.95,53.05 27.5,53.6 28.9,53.6 v29.25,53.95 | 29.09,54.11 v29.25,53.95 | JP2.11 29.07,54.13 v29.25,53.95 | U$19.P$4 86.71,33.89 74.3,46.3 v72.65,46.3 73.05,46.3 | v64.9,61.15 64.9,62.9 65.9,63.9 70.4,63.9 71.4,62.9 71.4,56.4 72.9,54.9 76.4,54.9 78.15,53.15 78.15,47.35 v78.2,47.3
N$58
  Top 0.254: LED13.A U$20.1
N$59
  Top 0.254: U$57.P$1 61.95,59.35 U$20.2
N$60  (via drill 0.8 pad 1.93)
  Top 0.254: v60.9,61.35 60.9,59.65 U$58.P$3
  Bottom 0.254: U$1.P$6 30.88,40.18 31,40.3 31,41.6 30.8,41.8 30.2,41.8 29.7,42.3 29.7,42.8 28.2,44.3 27,44.3 26.3,45 26.3,57.45 26.53,57.68 JP2.12 26.53,59.33 29.3,62.1 32.4,62.1 33,61.5 39,61.5 40,62.5 42.7,62.5 44,63.8 56.5,63.8 60.9,63.8 | U$19.P$10 86.3,37.7 84.05,39.95 84.05,54.61 83.33,55.33 82.96,55.7 80.42,58.24 80.42,60.24 80.42,63.5 U$9.P$2 78.12,65.8 74.32,65.8 65.3,65.8 63.3,63.8 60.9,63.8 | v60.9,61.35 60.9,63.8
N$61
  Top 0.254: LED14.A U$21.1
N$62
  Top 0.254: U$21.2 58.8,60.3 57.9,59.4 57.9,57.2 U$58.P$1
N$63
  Top 0.254: U$37.1 18.35,4.05 LED29.A
N$64
  Top 0.254: U$22.2 15.8,5.1 15.5,5.4 14.4,5.4 13.7,6.1 13.7,8 13.55,8.15 U$45.P$1
N$65
  Top 0.254: U$35.2 29.6,4.9 29,5.5 28.2,5.5 27.5,6.2 27.5,8.1 27.45,8.15 U$48.P$1
N$66
  Top 0.254: U$34.2 34.2,4.9 33.7,5.4 32.9,5.4 32.1,6.2 32.1,7.85 32.05,7.9 U$49.P$1
N$67
  Top 0.254: U$33.2 38.8,4.9 38.3,5.4 37.4,5.4 36.7,6.1 36.7,8.1 36.65,8.15 U$50.P$1
N$68
  Top 0.254: U$23.2 43.4,4.8 42.8,5.4 41.9,5.4 41.4,5.9 41.4,8 41.4,8.05 U$51.P$1
N$69
  Top 0.254: U$32.2 52.6,4.9 52.1,5.4 51.1,5.4 50.4,6.1 50.4,7.85 50.45,7.9 U$52.P$1
N$70
  Top 0.254: U$30.2 61.8,4.8 61.3,5.3 60.5,5.3 59.7,6.1 59.7,7.85 59.65,7.9 U$53.P$1
N$71
  Top 1.27: U$3.P$1 82.73,18.23 80.65,16.15 D2.A
N$72
  Top 0.254: X1.VCC 90.8,52.15 90.45,51.8
  Top 1.27: D1.A 89.4,50.65 90.45,51.8
PTD1  (via drill 0.8)
  Top 0.254: v10.9,32.9 10.3,32.3 7.6,32.3 7,31.7 7,30.2 7.6,29.6 10.8,29.6 11.5,28.9 11.5,27.9 12.2,27.2 17.5,27.2 18.9,28.6 21.4,28.6 22.3,27.7 22.3,27.1 20.6,25.4 20.6,23.7 24,20.3 24,19.1 26,17.1 36.1,17.1 36.7,16.5 39.1,16.5 41.3,18.7 67.5,18.7 68.8,17.4 68.8,16.3 v69.15,15.95 70.9,14.2 74.9,14.2 80.9,14.2 84.95,10.15 U$38.P$3
  Bottom 0.254: U$1.P$5 19.52,40.18 11.63,40.18 11.1,39.65 11.1,35.1 10.9,34.9 v10.9,32.9 | JP1.1 65.7,12.9 68.75,15.95 v69.15,15.95
PTD2  (via drill 0.8, 0.8 pad 1.93)
  Top 0.254: v66.6,17.3 66.6,16.4 70.1,12.9 72.5,12.9 73.8,12.9 77.6,12.9 80.35,10.15 U$39.P$3 | v11.15,11.55 11.15,20.95 10.9,21.2 7.6,21.2 4.2,24.6 4.2,34.2 6.2,36.2 6.2,40.9 6.9,41.6 10.7,41.6 11.2,41.1 11.4,40.9 11.4,40.15 12.5,39.05 12.75,38.8 v12.75,38.55
  Bottom 0.254: U$1.P$7 17.17,39.68 13.88,39.68 v12.75,38.55 | v11.15,11.55 11.15,11.25 17.6,4.8 59.7,4.8 62.41,7.51 JP1.2 62.41,15.11 62.7,15.4 64.2,15.4 66.1,17.3 v66.6,17.3
PTD3  (via drill 0.8, 0.8 pad 1.93)
  Top 0.254: v5.8,32.3 6.4,32.9 8.9,32.9 10.3,34.3 11.7,34.3 12.3,34.9 12.65,35.25 v12.65,36.1 | v63.5,17.2 64.7,16 66,16 69.8,12.2 71.8,12.2 73.7,12.2 75.75,10.15 U$40.P$3
  Bottom 0.254: v5.8,32.3 5.8,22.5 7.3,21 10.3,21 11.2,20.1 11.2,13.6 19.4,5.4 58.3,5.4 59.87,6.97 JP1.3 59.87,13.67 63.4,17.2 v63.5,17.2 | v12.65,36.1 12.65,36.4 14.4,38.15 14.4,38.5 15.08,39.18 U$1.P$9
PTD4  (via drill 0.8 pad 1.93)
  Top 0.254: v61,17 62.3,15.7 62.7,15.7 63,15.4 65.8,15.4 69.55,11.65 71.05,10.15 71.15,10.05 U$41.P$3
  Bottom 0.254: U$1.P$11 16.08,38.68 15.93,38.68 14.4,37.15 14.4,35.4 13.65,34.65 13.15,34.65 12.65,34.15 12.3,33.8 12.3,33.55 12.3,30.2 11.7,29.6 7.3,29.6 6.7,29 6.7,22.9 7.8,21.8 11.7,21.8 12.2,21.3 12.2,13.5 19.7,6 57,6 57.33,6.33 JP1.4 57.33,13.83 57.63,13.83 58.8,15 60,15 60.8,15.8 60.8,16.8 v61,17
PTD5  (via drill 0.8 pad 1.93)
  Top 0.254: v58.5,16.9 59.1,16.3 59.1,15.6 59.6,15.1 62.4,15.1 62.7,14.8 65.5,14.8 67,13.3 67,11.9 66.55,11.45 U$42.P$3
  Bottom 0.254: U$1.P$13 16.88,38.18 15.1,36.4 15.1,26.2 13,24.1 13,13.8 20.2,6.6 53.6,6.6 54.79,7.79 JP1.5 54.79,14.29 55.5,15 57.5,15 58.3,15.8 58.3,16.7 v58.5,16.9
PTD6  (via drill 0.8 pad 1.93)
  Top 0.254: v55.8,16.9 55.9,16.8 55.9,15.6 56.5,15 58.2,15 58.6,14.6 58.6,11.3 59.95,9.95 U$53.P$3
  Bottom 0.254: U$1.P$15 17.68,37.68 15.65,35.65 15.65,25.85 13.6,23.8 13.6,14.2 20.6,7.2 50.3,7.2 52.25,9.15 JP1.6 52.25,14.25 52.9,14.9 54.1,14.9 54.8,15.6 54.8,15.9 v55.8,16.9
PTD7  (via drill 0.8 pad 1.93)
  Top 0.254: v53.3,16.8 53.5,16.6 53.5,11.2 53.5,11.15 53.75,10.9 54.5,10.9 55.45,9.95 U$43.P$3
  Bottom 0.254: U$1.P$17 18.48,37.18 16.2,34.9 16.2,25.5 14.2,23.5 14.2,14.7 21.1,7.8 49.1,7.8 49.71,8.41 JP1.7 | JP1.7 | JP1.7 49.71,14.01 50.5,14.8 51.5,14.8 52.2,15.5 52.7,15.5 52.9,15.7 52.9,16.4 v53.3,16.8
PTE0  (via drill 0.8 pad 1.93)
  Top 0.254: v51,16.9 51,11.1 51.15,10.95 52.15,9.95 U$52.P$3
  Bottom 0.254: U$1.P$19 19.33,36.68 16.75,34.1 16.75,25.15 14.8,23.2 14.8,15.1 21.4,8.5 45.6,8.5 47.17,10.07 | 47.17,10.07 47.2,10.1 | 47.17,10.07 JP1.8 47.2,12.93 47.2,14.5 47.6,14.9 49.1,14.9 51,16.8 v51,16.9
PTE1  (via drill 0.8 pad 1.93)
  Top 0.254: v48.4,16.9 48.4,10.9 48.4,10.8 48.15,10.55 U$44.P$3
  Bottom 0.254: U$1.P$21 19.68,36.18 17.3,33.8 17.3,24.8 15.4,22.9 15.4,15.5 21.7,9.2 43.7,9.2 44.63,10.13 JP1.9 | 44.7,12.97 JP1.9 | JP1.9 44.63,14.33 45.4,15.1 46.7,15.1 48.4,16.8 v48.4,16.9
PTE2  (via drill 0.8 pad 1.93)
  Top 0.254: v45.8,16.9 45.9,16.8 45.9,11 45.4,10.5 44.85,9.95 U$51.P$3
  Bottom 0.254: U$1.P$23 20.18,35.68 17.85,33.35 17.85,24.55 16,22.7 16,16.1 22.3,9.8 39.9,9.8 42.09,11.99 JP1.10 | 42,12.99 JP1.10 | JP1.10 42.09,13.19 v45.8,16.9
PTE3  (via drill 0.8 pad 1.93)
  Top 0.254: v43.3,16.9 43.1,16.7 43.1,15.5 42.6,15 41.7,15 40.8,14.1 40.8,11.1 40.4,10.7 39.65,9.95 U$50.P$3
  Bottom 0.254: U$1.P$25 20.68,35.18 18.45,32.95 18.45,24.35 16.6,22.5 16.6,16.4 22.6,10.4 38.5,10.4 39.55,11.45 JP1.11 39.55,13.35 40.5,14.3 41,14.3 41.7,15 42.7,15 43.1,15.4 43.1,16.7 v43.3,16.9
PTE4  (via drill 0.8 pad 1.93)
  Top 0.254: v40.8,16.1 40,15.3 38.6,15.3 38.3,15 38.3,11.3 38.3,11.2 38.1,11 36,11 34.95,9.95 U$49.P$3
  Bottom 0.254: U$1.P$27 21.13,34.68 19.1,32.65 19.1,24.1 17.3,22.3 17.3,16.7 23,11 36.8,11 37.01,11.21 JP1.12 37.01,14.71 37.6,15.3 40,15.3 v40.8,16.1
PTE16  (via drill 0.8)
  Top 0.254: v20.55,27.25 19.9,26.6 19.9,23.5 23.4,20 23.4,18.7 25.55,16.55 34.55,16.55 v35.45,15.65 35.8,15.3 35.8,11.8 35.8,11.7 35.1,11 34.9,11 30.8,11 U$48.P$3
  Bottom 0.254: U$1.P$29 21.68,34.18 19.85,32.35 19.85,27.95 v20.55,27.25 | JP1.13 34.47,14.67 v35.45,15.65
PTE17  (via drill 0.8)
  Top 0.254: v30.65,15.2 29.9,15.2 29.3,15.8 25,15.8 | v19.35,21.8 19.42,21.73 20.8,21.73 22.5,20.03 22.5,18.3 25,15.8 | 25,15.8 24.8,15.6 24.8,13 25.15,12.65 U$47.P$3
  Bottom 0.254: U$1.P$31 22.18,33.68 20.4,31.9 20.4,29.9 21.3,29 21.65,29 24.6,26.05 24.6,23.2 24,22.6 22.2,22.6 21.3,21.7 19.45,21.7 v19.35,21.8 | JP1.14 31.93,13.92 v30.65,15.2
PTE18  (via drill 0.8)
  Top 0.254: v20.4,19.5 20.4,17.75 v23.2,14.95 20.55,12.3 U$46.P$3
  Bottom 0.254: U$1.P$33 22.68,33.18 21.4,31.9 21.4,30.1 25.5,26 25.5,23.2 24.3,22 22.9,22 v20.4,19.5 | JP1.15 29.39,13.91 28.35,14.95 v23.2,14.95
PTE19  (via drill 0.8 pad 1.93)
  Top 0.254: U$45.P$3 15.85,14.45 v18.9,17.5
  Bottom 0.254: U$1.P$35 23.08,32.68 22.3,31.9 22.3,30 26.6,25.7 26.6,23.3 22.6,19.3 22.6,18.7 20.3,16.4 | JP1.16 22.4,12.9 20.3,15 20.3,16.4 | v18.9,17.5 19.2,17.5 20.3,16.4
V+  (via drill 0.8)
  Top 0.254: C1.1 83.55,37.85 84,37.4 84,32.52 83.59,32.11
  Top 1.27: 86,28.56 86,29.7 83.59,32.11 IC1.3 | 86,28.56 86,27.5 84.7,26.2 83.05,26.2 82.1,25.25 82.1,23.3 79.2,20.4 78,19.2 U$12.2 U$10.2 U$11.2 71.4,19.2 | v8.35,30.95 8.4,31 14.4,31 14.9,31.5 22.4,31.5 26.5,27.4 26.5,26.8 26.7,26.6 26.7,20.2 27.1,19.8 68,19.8 69.25,19.8 69.65,19.4 69.85,19.2 71.4,19.2 | D2.C 71.65,16.15 71.15,16.65 71.15,18.95 71.4,19.2 | 86,28.56 90.06,28.56 91.15,29.65 91.15,45.65 89.9,46.9 85.15,46.9 83.9,48.15 83.75,48.3 D1.C
  Bottom 1.27: JP5.3 JP5.2 JP5.1 | JP5.1 8.9,38 8.5,37.6 | v8.35,30.95 8.35,34.81 JP5.1

## Text on the board
tPlace: !RESET | PTA0 | PTA1 | PTA2 | PTA3 | PTA4 | PTA18 | PTA19 | PTC4 | PTC5 | PTC6 | PTC7 | RESET | PWR ONLY | POWER | KW2DEV.PCB.v1.0 | VIN | JTAG | R.S. 5/29/2015 | +3.3V | - | + | GND | PTE19 | PTE18 | PTE17 | PTE16 | PTE4 | PTE3 | PTE2 | PTE1 | PTE0 | PTD7 | PTD6 | PTD5 | PTD4 | PTD3 | PTD2 | PTD1 | 4.5V - 15V